# Altium PCB YYB-PCB2.PcbDoc
Units mm, origin at the board's own origin, x right, y up, seen from the top; angles counter-clockwise.
Board outline 15.24 x 297.69 mm, 2 copper layers (Top Layer, Bottom Layer); 79 components, 56 nets, 227 pads, 0 vias.
Unrouted connection lines stored in the file: 153.
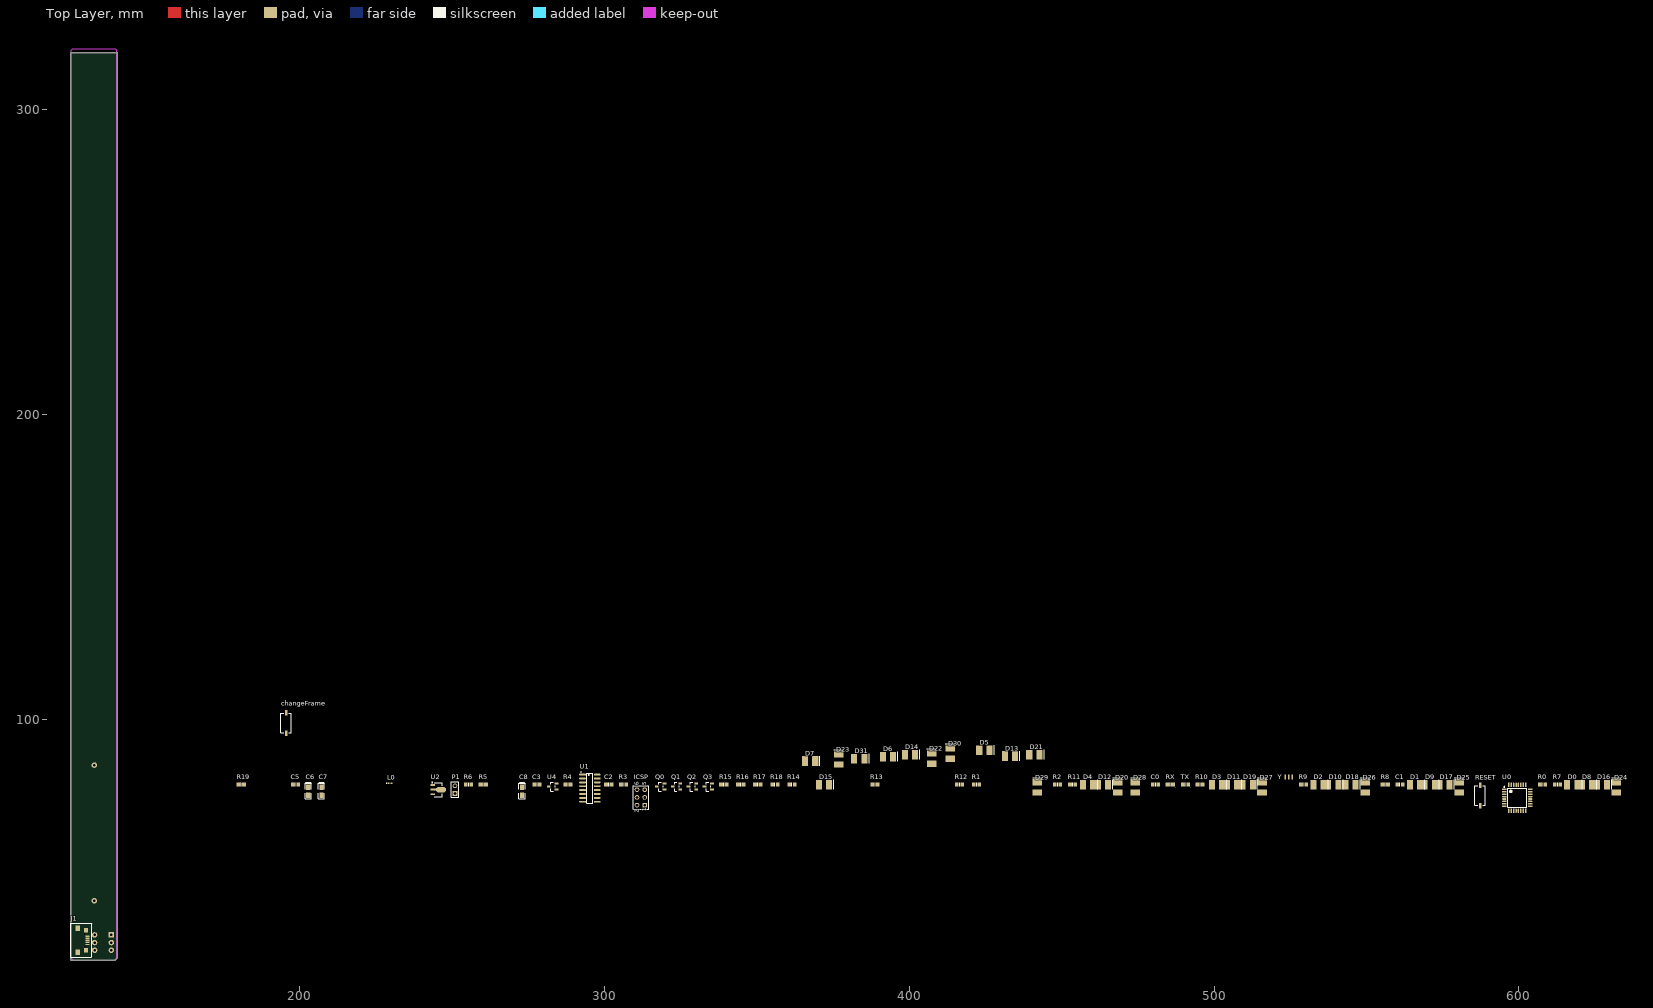
[diagram p0: Top Layer view]
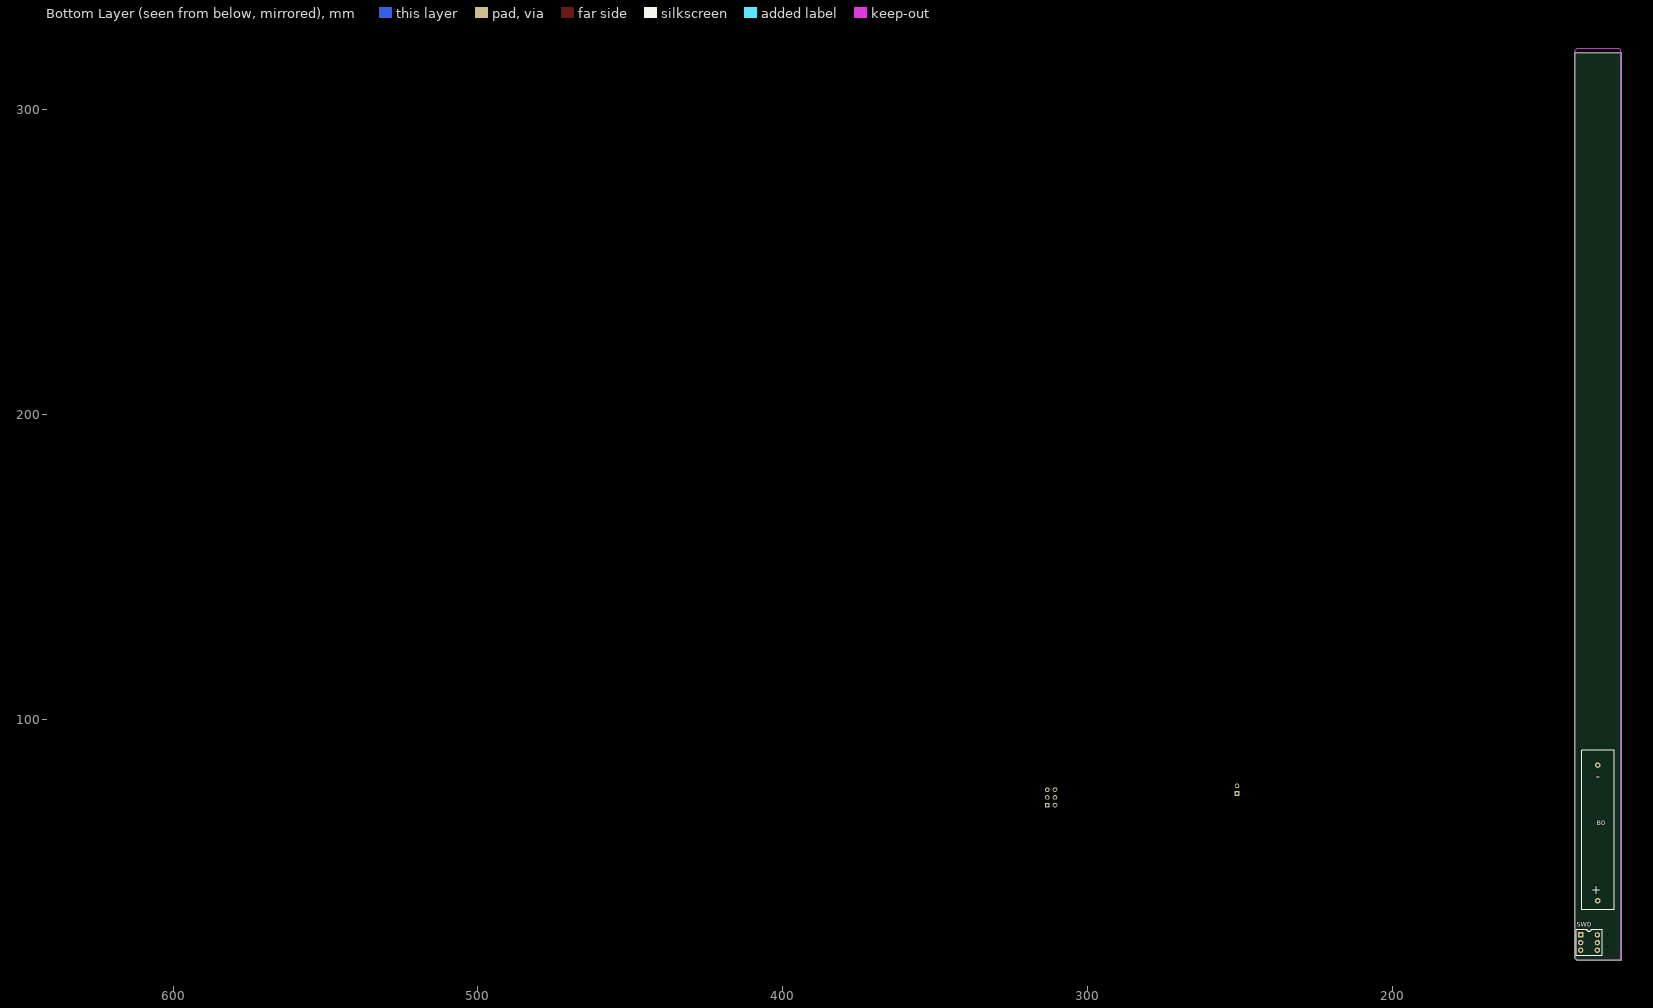
[diagram p1: Bottom Layer view, seen from below]

## Layer stack, top to bottom
Top Solder: solder mask 0.0102, Solder Resist, Dk 3.5
Top Layer: signal copper 0.0356
Dielectric 1: dielectric 0.32, FR-4, Dk 4.8
Bottom Layer: signal copper 0.0356
Bottom Solder: solder mask 0.0102, Solder Resist, Dk 3.5

## Board outline
125.095,21.336 ccw(c125.222,21.336) 125.222,21.209 ccw(c125.349,21.209) 125.349,21.082 139.446,21.082 ccw(c139.446,21.209) 139.537,21.119 139.536,21.119 140.298,21.881 140.298,21.88 ccw(c140.208,21.971) 140.335,21.971 140.335,318.643 ccw(c140.208,318.643) 140.208,318.77 125.222,318.77 ccw(c125.222,318.643) 125.095,318.643

## Design rules (kind name [scope] priority, off if disabled: settings)
Clearance [All] p1: gap=0.254
PolygonConnect [All] p1: connectstyle=Relief reliefconductorwidth=0.254 reliefentries=4 polygonreliefangle="90 Angle" airgapwidth=0.254
RoutingVias [All] p1: holewidth=0.711 width=1.27 viastyle="Through Hole" minholewidth=0.711 minwidth=1.27 maxholewidth=0.711 maxwidth=1.27
SolderMaskExpansion [All] p1: expansion=0.102
Width [All] p1: maxlimit=0.254 minlimit=0.254 preferedwidth=0.254
30 further rules are at their usual default settings.

## Components (designator, comment, footprint, x,y, rotation, side; value= is the part's Value field where it differs from the comment)
B0 "7号电池 1.5V" BAT 133.096,69.342 r0 bottom
C0 "" 6-0805_N 480.822,78.74 r0 top
C1 "Cap" 6-0805_N 560.959,78.74 r0 top
C2 "Cap" 6-0805_N 301.498,78.74 r0 top
C3 "Cap" 6-0805_N 278.003,78.74 r0 top
C5 "0805" 6-0805_N 198.755,78.74 r0 top
C6 "CASE-A" CASE-A_3216 202.946,76.581 r90 top
C7 "CASE-A" CASE-A_3216 207.264,76.581 r90 top
C8 "CASE-A" CASE-A_3216 273.05,76.581 r90 top
changeFrame "SW-PB" KEY_SODFL_2-LEADS 195.707,98.933 r90 top
D0 "" LED_3528 617.474,78.74 r0 top
D1 "" LED_3528 565.912,78.74 r0 top
D2 "" LED_3528 534.289,78.74 r0 top
D3 "" LED_3528 501.015,78.74 r0 top
D4 "" LED_3528 458.724,78.74 r0 top
D5 "" LED_3528 424.688,90.043 r0 top
D6 "" LED_3528 393.065,87.884 r0 top
D7 "" LED_3528 367.538,86.487 r0 top
D8 "" LED_3528 622.3,78.74 r0 top
D9 "" LED_3528 570.738,78.74 r0 top
D10 "" LED_3528 539.115,78.74 r0 top
D11 "" LED_3528 505.841,78.74 r0 top
D12 "" LED_3528 463.55,78.74 r0 top
D13 "" LED_3528 433.07,88.138 r0 top
D14 "" LED_3528 400.304,88.519 r0 top
D15 "" LED_3528 372.11,78.74 r0 top
D16 "" LED_3528 627.253,78.74 r0 top
D17 "" LED_3528 575.564,78.74 r0 top
D18 "" LED_3528 544.703,78.74 r0 top
D19 "" LED_3528 511.048,78.74 r0 top
D20 "" LED_3528 468.376,77.851 r90 top
D21 "" LED_3528 441.071,88.519 r0 top
D22 "" LED_3528 407.416,87.249 r90 top
D23 "" LED_3528 376.936,86.995 r90 top
D24 "" LED_3528 631.952,77.851 r90 top
D25 "" LED_3528 580.39,77.851 r90 top
D26 "" LED_3528 549.529,77.851 r90 top
D27 "" LED_3528 515.747,77.851 r90 top
D28 "" LED_3528 474.218,77.851 r90 top
D29 "" LED_3528 442.087,77.851 r90 top
D30 "" LED_3528 413.512,88.9 r90 top
D31 "" LED_3528 383.667,87.249 r0 top
ICSP "ICSP" HDR2X3 313.309,72.009 r90 top
J1 "USB_MINI" MICRO_USB 130.556,27.686 r270 top
L0 "Inductor" 0402-A 229.743,79.248 r0 top
P1 "Header 2" HDR1X2 251.079,75.819 r90 top
Q0 "transistor" SOT-23 318.516,78.105 r0 top
Q1 "transistor" SOT-23 323.723,78.105 r0 top
Q2 "8050" SOT-23 328.93,78.105 r0 top
Q3 "transistor" SOT-23 334.137,78.105 r0 top
R0 "" 6-0805_N 607.695,78.74 r0 top
R1 "Res1" 6-0805_N 422.148,78.74 r0 top
R2 "Res1" 6-0805_N 448.691,78.74 r0 top
R3 "Res1" 6-0805_N 306.324,78.74 r0 top
R4 "Res1" 6-0805_N 288.163,78.74 r0 top
R5 "Res1" 6-0805_N 260.35,78.74 r0 top
R6 "Res1" 6-0805_N 255.524,78.74 r0 top
R7 "Res1" 6-0805_N 612.648,78.74 r0 top
R8 "Res1" 6-0805_N 556.133,78.74 r0 top
R9 "Res1" 6-0805_N 529.336,78.74 r0 top
R10 "Res1" 6-0805_N 495.427,78.74 r0 top
R11 "Res1" 6-0805_N 453.644,78.74 r0 top
R12 "Res1" 6-0805_N 416.56,78.74 r0 top
R13 "Res1" 6-0805_N 388.874,78.74 r0 top
R14 "Res1" 6-0805_N 361.569,78.74 r0 top
R15 "Res1" 6-0805_N 339.217,78.74 r0 top
R16 "Res1" 6-0805_N 344.805,78.74 r0 top
R17 "Res1" 6-0805_N 350.393,78.74 r0 top
R18 "Res1" 6-0805_N 355.981,78.74 r0 top
R19 "Res1" 6-0805_N 180.975,78.74 r0 top
RESET "SW-PB" KEY_SODFL_2-LEADS 587.248,75.184 r90 top
RX "" LED_0805 485.648,78.74 r0 top
SW0 "SelfLockSW" KEY_ZS_8*8 135.636,27.686 r180 bottom
TX "" LED_0805 490.601,78.74 r0 top
U0 "ATMEL328P" "TQFP 32" 599.44,74.422 r0 top
U1 "CH340B" SOP16 295.91,74.422 r0 top
U2 "KX2304" SOT89N 245.618,77.089 r0 top
U4 "SC662K" SOT-23 283.083,78.105 r0 top
Y "XTAL" XTAL 524.51,81.788 r90 top

## Footprints (in the part's own frame and the unit in brackets; to place one, negate y for a bottom-side part, rotate by r counter-clockwise, add the part's x,y. Pads: shape width x height; smd on the part's side, far side on the other; paste and mask are expansions set on the pad)
6-0805_N [mm] "Chip Resistor, Body 2.0x1.2mm, IPC Medium Density"
  rect 1.2x1.4 smd: 1(-0.9,0) 2(0.9,0)
  silkscreen extent 0,-0.6 0,0.6, body extent -1.07,-0.7 1.07,0.7, height 0.7
0402-A [mm] "Chip Inductor, Body 1.0x0.5mm, IPC High Density"
  rect 0.6x0.5 smd: 1(-0.5,0) 2(0.5,0)
  silkscreen extent -1.1,-0.15 -1.1,0.15, body extent -0.55,-0.3 0.55,0.3, height 0.55
BAT [mm]
  round 1.8 hole 0.8: 1(-0.3,28.7) 2(-0.3,-15.8)
  silkscreen extent -5.7,-20.7 5,31.6
CASE-A_3216 [mm]
  rect 1.8x1.35 smd: 1(1.31,0) 2(-1.31,0)
  silkscreen extent -2.54,-1 2.97,1, body extent -1.7,-0.84 1.7,0.84, height 1.71
HDR1X2 [mm] "Connector; Header; 2 Position"
  rect 1.5x1.5 hole 0.9: 1(0,0)
  round 1.5 hole 0.9: 2(2.54,0)
  silkscreen extent -1.27,-1.27 3.81,1.27
HDR2X3 [mm] "Connector; Header; 3x2 Position"
  rect 1.5x1.5 hole 0.9: 1(0,0)
  round 1.5 hole 0.9: 2(0,2.54) 3(2.54,0) 4(2.54,2.54) 5(5.08,0) 6(5.08,2.54)
  silkscreen extent -1.27,-1.27 6.35,3.81
KEY_SODFL_2-LEADS [mm] "SODFL, 2-Leads, Body 3.25x8.00mm, IPC Medium Density"
  rect 1.85x0.85 smd: 1(-3.375,0) 2(3.375,0)
  silkscreen extent -3.25,-1.75 3.25,1.75, body extent -4,-1.8 4,1.91, height 2.5
KEY_ZS_8*8 [mm]
  rect 1.8x1.8 hole 0.8: 1(-2.75,1.75)
  round 1.8 hole 0.8: 2(-2.75,-0.75) 3(-2.75,-3.25) 4(2.75,-3.25) 5(2.75,-0.75) 6(2.75,1.75)
  silkscreen extent -4.25,-5 4.25,3.5, body extent -3.5,-4.26 3.5,2.74, height 13
LED_0805 [mm] "Chip LED  Body 2.0x1.2mm, IPC Medium Density"
  rect 1.2x1.4 smd: 1(-0.9,0) 2(0.9,0)
  silkscreen extent 0,-0.9 1.7,0.6, body extent -1.07,-0.7 1.07,0.7, height 0.7
LED_3528 [mm] "Chip Diode, 2-Leads, Body 5.00x3.00mm, IPC Medium Density"
  rect 2x3.15 smd: 1(-1.675,0) 2(1.675,0)
  silkscreen extent 3.2,-1.5 3.2,1.6, body extent -2.5,-1.5 2.5,1.5, height 2
MICRO_USB [mm]
  round 0.5 hole 0.5: 0(-2.032,-1.016) 0(2.032,-1.016)
  rect 0.4x1.2 smd: 1(-1.333,0) 2(-0.667,0) 3(0,0) 4(0.667,0) 5(1.333,0)
  rect 1.4x1.4 smd: 6(-3.302,-0.508) 7(3.302,-0.508)
  rect 1.7x1.5 smd: 8(-3.937,-3.175) 9(3.937,-3.175)
  silkscreen extent -5.54,-5.46 5.59,1.4, body extent -4.4,-5.72 4.4,0.02, height 2.71
SOP16 [mm] "CH340G"
  oval 2.2x0.6 smd: 1(-3,7.595) 2(-3,6.325) 3(-3,5.055) 4(-3,3.785) 5(-3,2.515) 6(-3,1.245) 7(-3,-0.025) 8(-3,-1.295) 9(1.8,-1.295) 10(1.8,-0.025) 11(1.8,1.245) 12(1.8,2.515) 13(1.8,3.785) 14(1.8,5.055) 15(1.8,6.325) 16(1.8,7.595)
  silkscreen extent -3.65,-1.83 0.4,8.6, body extent -3.68,-1.78 2.51,8.13, height 1.7
SOT89N [mm] "SOT89, 3-Leads, Body 4.5x2.4 mm, Pitch 1.5mm, Lead Span 4.1mm, IPC Medium Density"
  rect 1.4x0.6 smd: 1(-1.8,1.5) 3(-1.8,-1.5)
  rect 1.8x0.6 smd: 2(-1.6,0)
  oct 3.2x1.9 smd: 2(0.9,0)
  silkscreen extent -2.07,-2.3 1.3,2.47, body extent -1.3,-2.3 1.3,2.3, height 1.6
SOT-23 [mm]
  rect 1.25x0.7 smd: 1(1.25,-0.95) 2(1.25,0.95) 3(-1.25,0)
  silkscreen extent -0.65,-1.46 0.9,1.46, body extent -1.5,-1.5 1.5,1.5, height 1.3
"TQFP 32" [mm] "ATMEL 328P"
  oval 1.5x0.5 smd: 1(-4.25,2.8) 2(-4.25,2) 3(-4.25,1.2) 4(-4.25,0.4) 5(-4.25,-0.4) 6(-4.25,-1.2) 7(-4.25,-2) 8(-4.25,-2.8) 17(4.25,-2.8) 18(4.25,-2) 19(4.25,-1.2) 20(4.25,-0.4) 21(4.25,0.4) 22(4.25,1.2) 23(4.25,2) 24(4.25,2.8)
  oval 0.5x1.5 smd: 9(-2.8,-4.25) 10(-2,-4.25) 11(-1.2,-4.25) 12(-0.4,-4.25) 13(0.4,-4.25) 14(1.2,-4.25) 15(2,-4.25) 16(2.8,-4.25) 25(2.8,4.25) 26(2,4.25) 27(1.2,4.25) 28(0.4,4.25) 29(-0.4,4.25) 30(-1.2,4.25) 31(-2,4.25) 32(-2.8,4.25)
  silkscreen extent -4.37,-3.1 3.1,3.72, body extent -4.57,-4.57 4.57,4.57, height 1.62
XTAL [mm] "Chip Array, ConvexE, 6-Leads, Pitch 1.20mm,  Body 3.20x1.50mm,  IPC Medium Density"
  rect 1.6x0.5 smd: 1(-0.6,1.2) 2(-0.6,0) 3(-0.6,-1.2)

## Part data
B0: library part Battery
C0 C5: library part Cap, "Capacitor"
C1 C2 C3: "Capacitor"
C6 C7 C8: library part "Cap Pol1", "Polarized Capacitor (Radial)"
changeFrame RESET: "Switch"
D0 D1 D2 D3 D4 D5 D6 D7 D8 D9 D10 D11 D12 D13 D14 D15 D16 D17 D18 D19 D20 D21 D22 D23 D24 D25 D26 D27 D28 D29 D30 D31 RX TX: library part LED
P1: "Header, 2-Pin"
Q2: library part transistor
R0: library part Res1, "Resistor"
R1 R2 R3 R4 R5 R6 R7 R8 R9 R10 R11 R12 R13 R14 R15 R16 R17 R18 R19: "Resistor"
SW0: library part SelfLockSwitch, "自锁开关"
U0: library part ATMEL-328P
U1: "usb to uart"
U4: library part SC662k-3.3V, "3.3V 稳压芯片"

## Nets (pads, with @x,y where several pads share a name; then routed paths per layer and width w, separated by ;. In a path a pad name is that pad's centre, name@x,y a point inside that pad or via, vN(x,y) a via of type N, cw(c..) or ccw(c..) an arc to the next point about the centre after c; other vN are vias at no path point)
3.3V: C1.2 C2.2 C5.2 C6.1 C8.1 Q0.3 Q1.3 Q2.3 Q3.3 R0.1 R1.1 R2.1 R5.2 R6.2 U0.4 U0.6 U0.18 U1.4 U1.16 U2.2 U4.2
A0: P1.1 R5.1 U0.23
A1: changeFrame.2 R6.1 U0.24
A2: U0.25
A3: U0.26
A4: U0.27
A5: U0.28
A6: U0.19
A7: U0.22
AGND: B0.2 C5.1 C6.2 C7.2 C8.2 J1.5 R19.2 U2.1 U4.1
D0/RXD: R3.1 RX.2 U0.30
D1/TXD: R4.1 TX.2 U0.31
D2: R7.2 U0.32
D3: R8.2 U0.1
D4: R9.2 U0.2
D5: R10.2 U0.9
D6: R11.2 U0.10
D7: R12.2 U0.11
D8: R13.2 U0.12
D9: R14.2 U0.13
D10: R15.2 U0.14
D11/MOSI: ICSP.4 R16.2 U0.15
D12/MISO: ICSP.1 R17.2 U0.16
D13/SCK: ICSP.3 U0.17
GND: C0.1 C1.1 C2.1 changeFrame.1 ICSP.6 P1.2 R19.1 RESET.1 U0.3 U0.5 U0.21 U1.1 Y.2
LED0: D0.2 D8.2 D16.2 D24.2 R7.1
LED1: D1.2 D9.2 D17.2 D25.2 R8.1
LED2: D2.2 D10.2 D18.2 D26.2 R9.1
LED3: D3.2 D11.2 D19.2 D27.2 R10.1
LED4: D4.2 D12.2 D20.2 D28.2 R11.1
LED5: D5.2 D13.2 D21.2 D29.2 R12.1
LED6: D6.2 D14.2 D22.2 D30.2 R13.1
LED7: D7.2 D15.2 D23.2 D31.2 R14.1
NetB0_1: B0.1 SW0.2 SW0.5
NetC0_2: C0.2 U0.20
NetC3_1: C3.1 U1.13
NetC7_1: C7.1 L0.2 U2.3
NetD0_1: D0.1 D1.1 D2.1 D3.1 D4.1 D5.1 D6.1 D7.1 Q0.2
NetD8_1: D8.1 D9.1 D10.1 D11.1 D12.1 D13.1 D14.1 D15.1 Q1.2
NetD16_1: D16.1 D17.1 D18.1 D19.1 D20.1 D21.1 D22.1 D23.1 Q2.2
NetD24_1: D24.1 D25.1 D26.1 D27.1 D28.1 D29.1 D30.1 D31.1 Q3.2
NetL0_1: L0.1 SW0.1 SW0.6
NetQ0_1: Q0.1 R15.1
NetQ1_1: Q1.1 R16.1
NetQ2_1: Q2.1 R17.1
NetQ3_1: Q3.1 R18.1
NetR1_2: R1.2 RX.1
NetR2_2: R2.2 TX.1
NetR3_2: R3.2 U1.2
NetR4_2: R4.2 U1.3
NetU0_7: U0.7 Y.1
NetU0_8: U0.8 Y.3
RESET: C3.2 ICSP.5 R0.2 RESET.2 U0.29
UD+: J1.3 U1.5
UD-: J1.2 U1.6
USB_5V: ICSP.2 J1.1 U4.3
pads on no net: J1.0 J1.4 J1.6 J1.7 J1.8 J1.9 R18.2 SW0.3 SW0.4 U1.7 U1.8 U1.9 U1.10 U1.11 U1.12 U1.14 U1.15

## Keep-outs
Keep-Out Layer:
  lines w0.254: 125.222,21.844 125.222,25.908 125.222,319.532 125.73,320.04 139.7,320.04 140.208,319.532 140.208,21.844 139.573,21.209 125.857,21.209 125.222,21.844

## Text inside footprints (layer, text, board x,y; h text height)
B0: Bottom Overlay "+" at 131.696,46.342 h5 r180; Bottom Overlay "-" at 131.896,83.242 h5 r180
ICSP: Top Overlay "6" at 311.277,78.613 h1.27 r90; Top Overlay "5" at 313.817,78.613 h1.27 r90; Top Overlay "2" at 311.277,69.469 h1.27 r90; Top Overlay "1" at 313.817,69.977 h1.27 r90